# Altium PCB DLP-Cape.PcbDoc
Units mil, origin at the board's own origin, x right, y up, seen from the top; angles counter-clockwise.
Board outline 3400 x 2150 mil, 2 copper layers (Top Layer, Bottom Layer); 2 components, 0 nets, 96 pads, 0 vias.
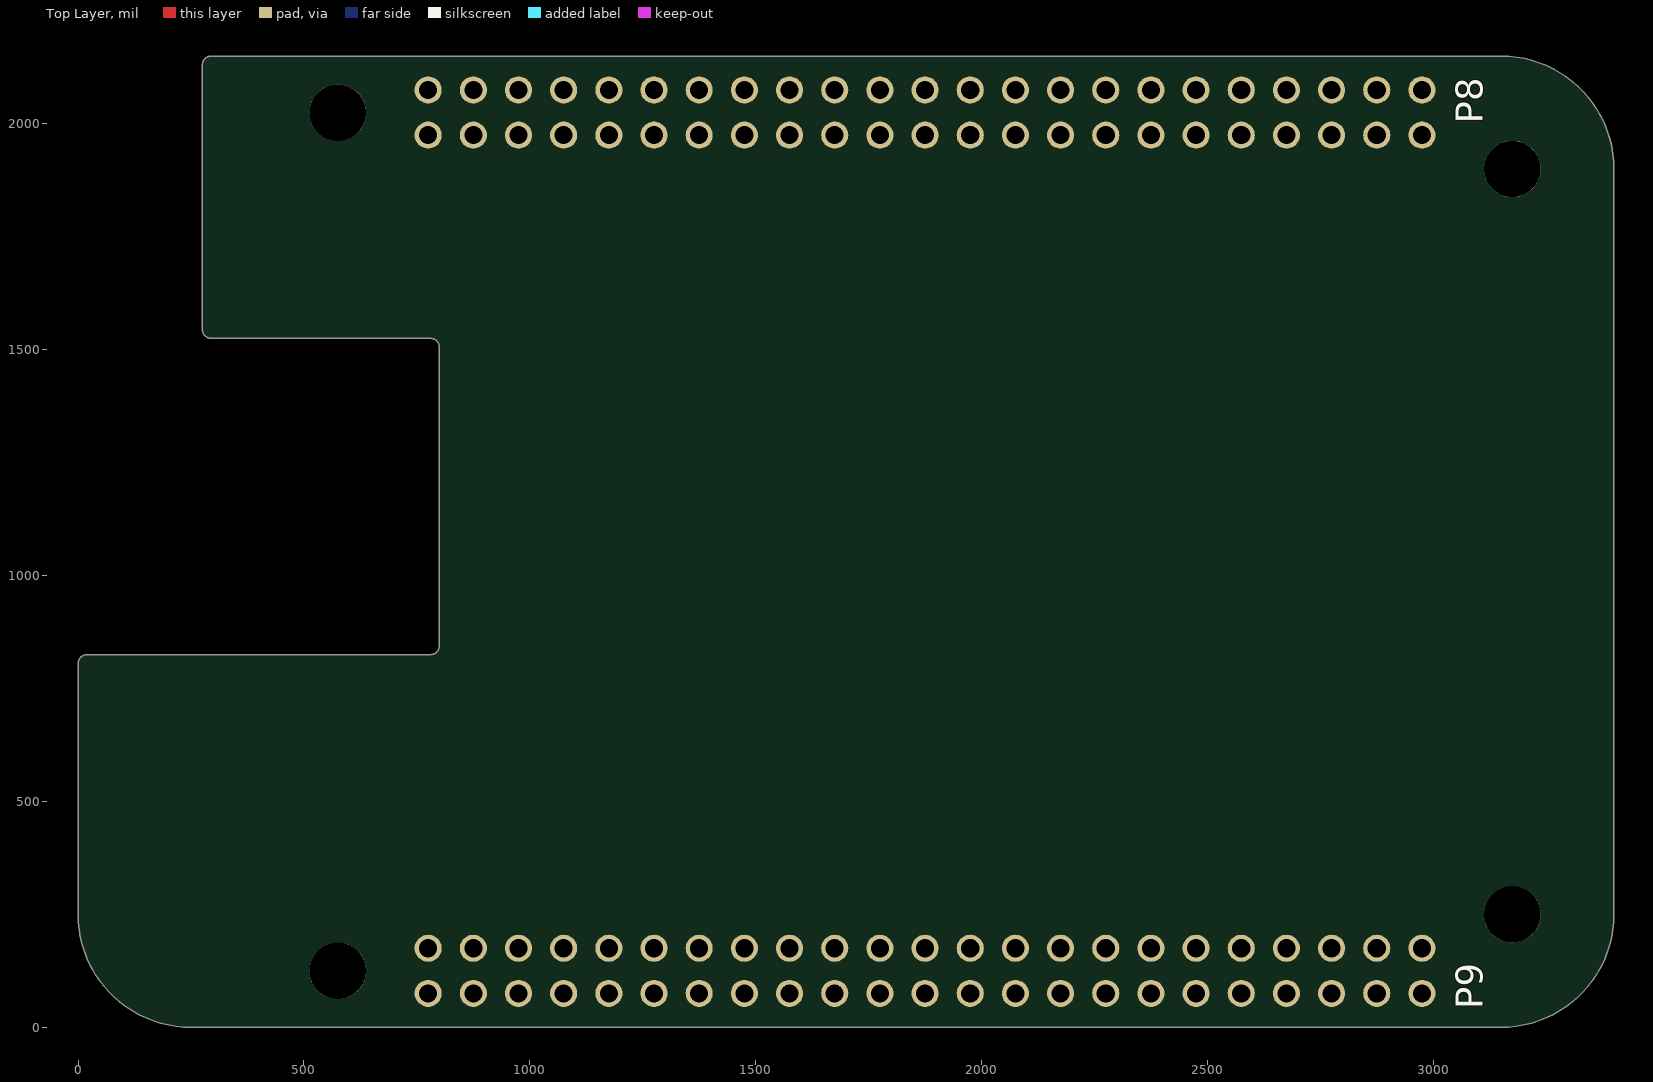
[diagram p0: Top Layer view]
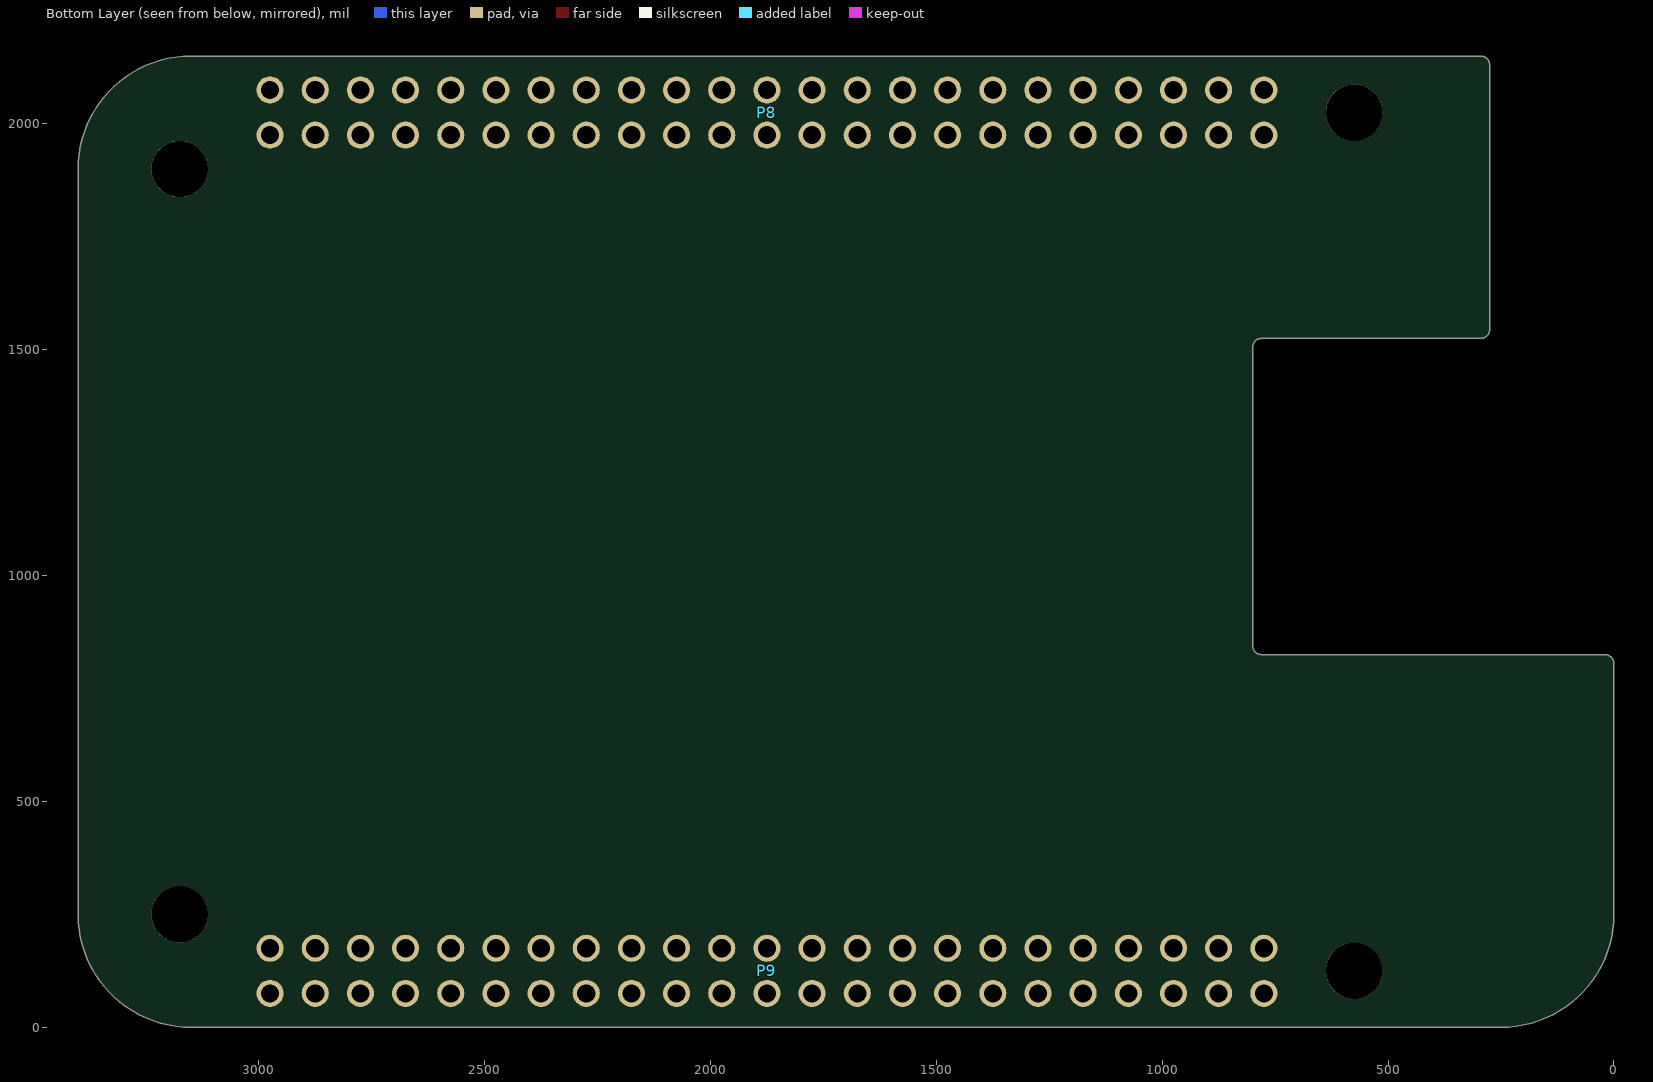
[diagram p1: Bottom Layer view, seen from below]

## Layer stack, top to bottom
Top Solder: solder mask 0.4, Solder Resist, Dk 3.5
Top Layer: signal copper 1.4
Dielectric 1: dielectric 12.6, FR-4, Dk 4.8
Bottom Layer: signal copper 1.4
Bottom Solder: solder mask 0.4, Solder Resist, Dk 3.5

## Board outline
0,250 0,805 cw(c20,805) 20,825 780,825 ccw(c780,845) 800,845 800,1505 ccw(c780,1505) 780,1525 295,1525 cw(c295,1545) 275,1545 275,2130 cw(c295,2130) 295,2150 3150,2150 cw(c3150,1900) 3400,1900 3400,250 cw(c3150,250) 3150,0 250,0 cw(c250,250)

## Design rules (kind name [scope] priority, off if disabled: settings)
Clearance [All] p1: gap=10
PolygonConnect [All] p1: connectstyle=Relief reliefconductorwidth=10 reliefentries=4 polygonreliefangle="90 Angle" airgapwidth=10
RoutingVias [All] p1: holewidth=28 width=50 viastyle="Through Hole" minholewidth=28 minwidth=50 maxholewidth=28 maxwidth=50
SolderMaskExpansion [All] p1: expansion=4
Width [All] p1: maxlimit=10 minlimit=10 preferedwidth=10
30 further rules are at their usual default settings.

## Components (designator, comment, footprint, x,y, rotation, side; value= is the part's Value field where it differs from the comment)
P8 "BBB_P8" BBB_CAPE_HEADER 775,1975 r180 bottom
P9 "BBB_P9" BBB_CAPE_HEADER 775,75 r180 bottom

## Footprints (in the part's own frame and the unit in brackets; to place one, negate y for a bottom-side part, rotate by r counter-clockwise, add the part's x,y. Pads: shape width x height; smd on the part's side, far side on the other; paste and mask are expansions set on the pad)
BBB_CAPE_HEADER [mil] "46-pin male header for BeagleBone Black P8,P9"
  round 60 hole 40: 1(0,0) 2(0,100) 3(-100,0) 4(-100,100) 5(-200,0) 6(-200,100) 7(-300,0) 8(-300,100) 9(-400,0) 10(-400,100) 11(-500,0) 12(-500,100) 13(-600,0) 14(-600,100) 15(-700,0) 16(-700,100) 17(-800,0) 18(-800,100) 19(-900,0) 20(-900,100) 21(-1000,0) 22(-1000,100) 23(-1100,0) 24(-1100,100) 25(-1200,0) 26(-1200,100) 27(-1300,0) 28(-1300,100) 29(-1400,0) 30(-1400,100) 31(-1500,0) 32(-1500,100) 33(-1600,0) 34(-1600,100) 35(-1700,0) 36(-1700,100) 37(-1800,0) 38(-1800,100) 39(-1900,0) 40(-1900,100) 41(-2000,0) 42(-2000,100) 43(-2100,0) 44(-2100,100) 45(-2200,0) 46(-2200,100)
  body extent -2246,-42 46,142, height 408

## Free pads (board coordinates)
  round 125 hole 125 unplated: NPTH(575,125) NPTH(575,2025) NPTH(3175,250) NPTH(3175,1900)

## Nets (pads, with @x,y where several pads share a name; then routed paths per layer and width w, separated by ;. In a path a pad name is that pad's centre, name@x,y a point inside that pad or via, vN(x,y) a via of type N, cw(c..) or ccw(c..) an arc to the next point about the centre after c; other vN are vias at no path point)
pads on no net: P8.1 P8.2 P8.3 P8.4 P8.5 P8.6 P8.7 P8.8 P8.9 P8.10 P8.11 P8.12 P8.13 P8.14 P8.15 P8.16 P8.17 P8.18 P8.19 P8.20 P8.21 P8.22 P8.23 P8.24 P8.25 P8.26 P8.27 P8.28 P8.29 P8.30 P8.31 P8.32 P8.33 P8.34 P8.35 P8.36 P8.37 P8.38 P8.39 P8.40 P8.41 P8.42 P8.43 P8.44 P8.45 P8.46 P9.1 P9.2 P9.3 P9.4 P9.5 P9.6 P9.7 P9.8 P9.9 P9.10 P9.11 P9.12 P9.13 P9.14 P9.15 P9.16 P9.17 P9.18 P9.19 P9.20 P9.21 P9.22 P9.23 P9.24 P9.25 P9.26 P9.27 P9.28 P9.29 P9.30 P9.31 P9.32 P9.33 P9.34 P9.35 P9.36 P9.37 P9.38 P9.39 P9.40 P9.41 P9.42 P9.43 P9.44 P9.45 P9.46

## Silkscreen, mask and mechanical layers (free items; w line width, h text height)
Mechanical 1:
  the board outline again, w10